# EAGLE board HighVoltageOutputMirror (EAGLE 9.0.1)
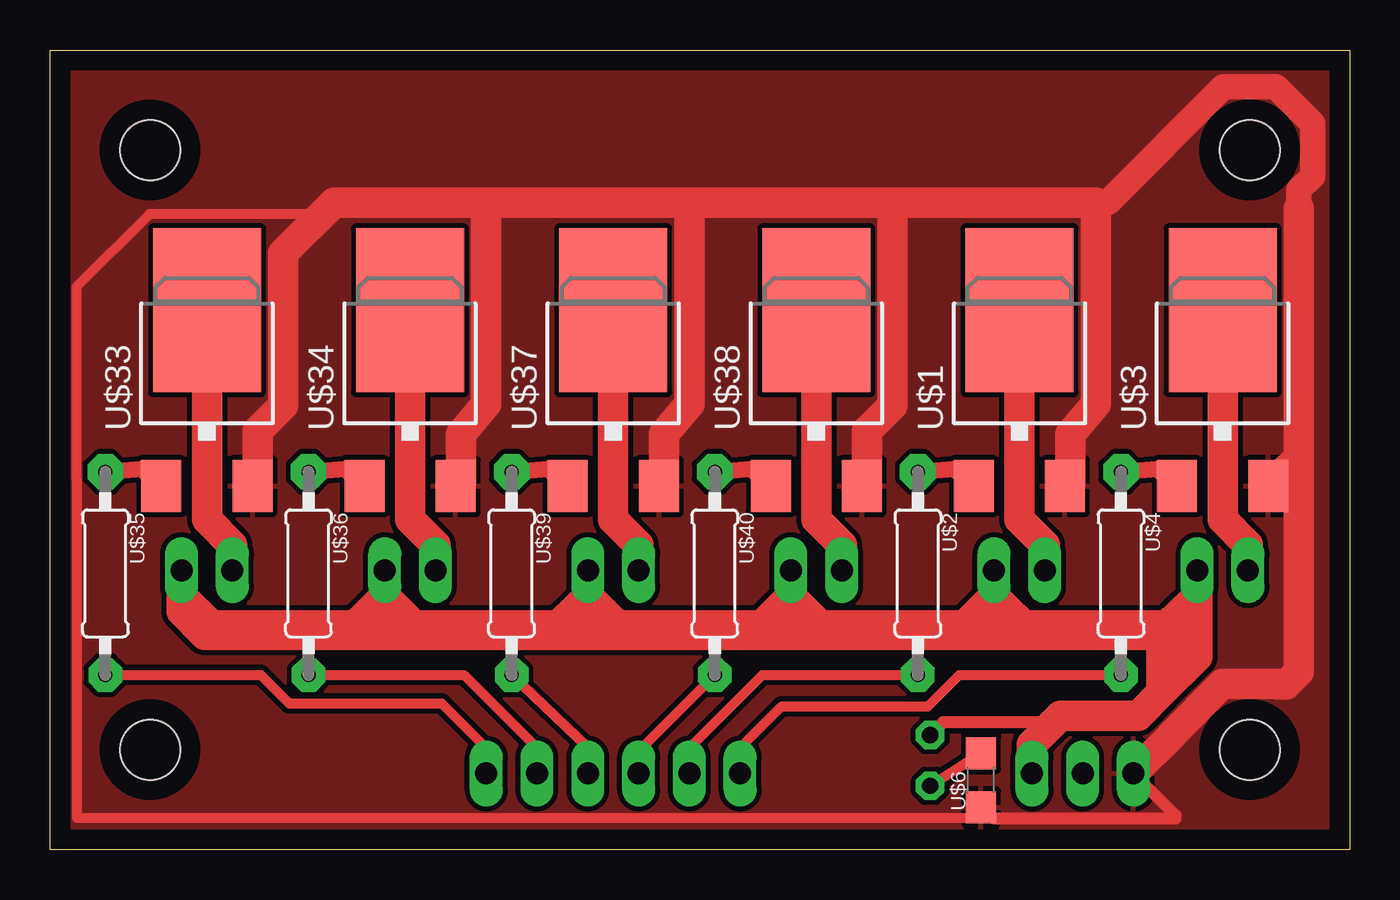
[diagram p0: board, top side]
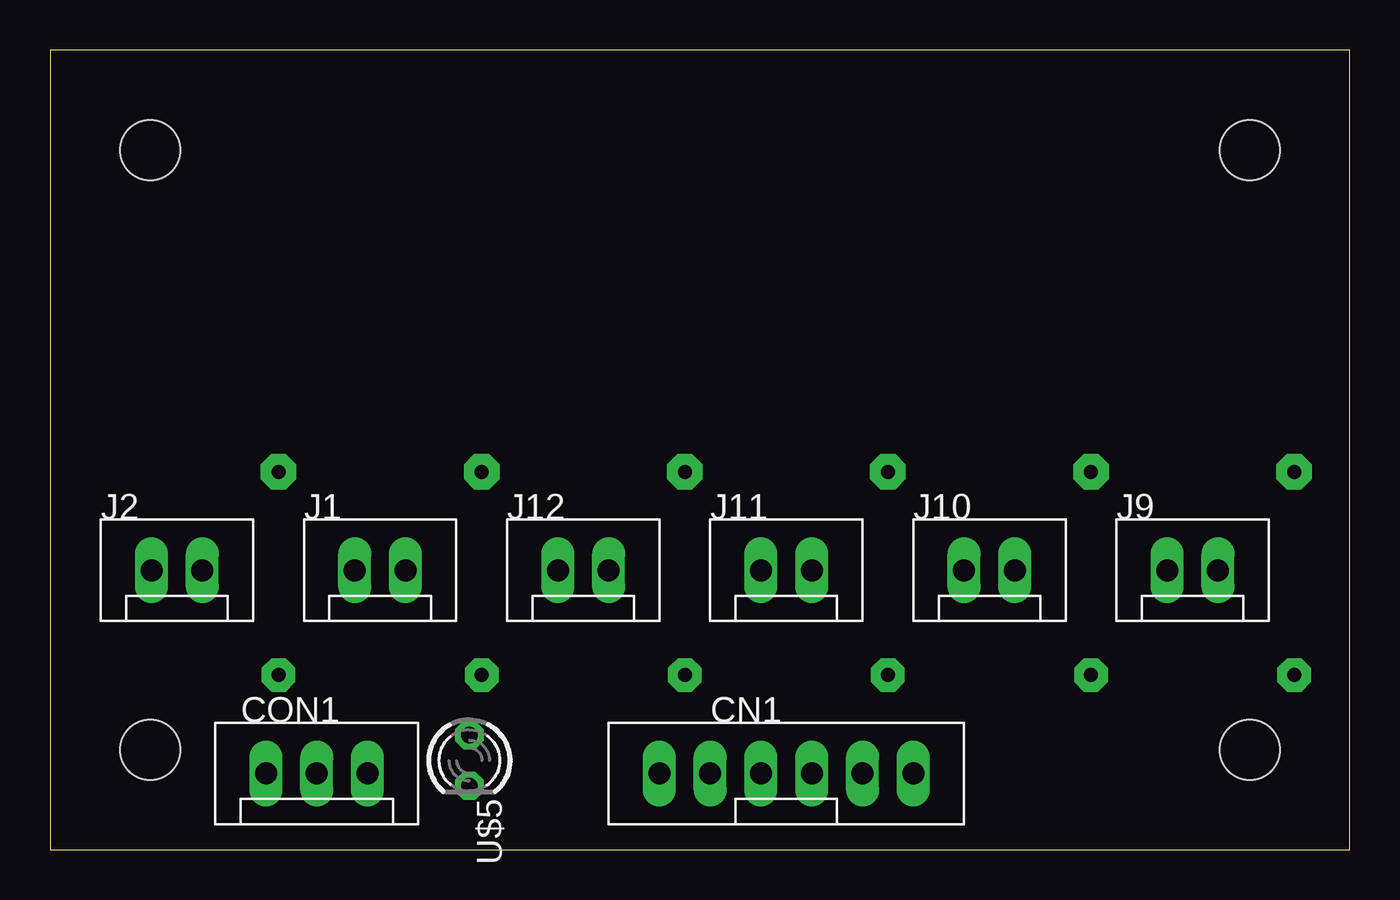
[diagram p1: board, bottom side, seen from below]

Size 65 x 40 mm. Coordinates in mm from the lower left corner, seen from the top.
Outline: 65,0 0,0 0,40 65,40 65,0
Copper layers (1*16): Top 0.035mm / dielectric 1.5mm / Bottom 0.035mm
Design rules "default *": minimum track width 6mil, minimum drill 0.35mm, track to track 10mil, track to pad 10mil, pad to pad 10mil, via to via 10mil, smd to smd 6mil, copper to edge 40mil, drill to drill 6mil, minimum pad ring 10mil, minimum via ring 8mil, stop-mask expansion 4mil, vias tented up to drill 0mil, thermal gap 10mil
Holes 3 mm at 60,5 5,5 5,35 60,35

## Footprints (pad centres in the part's own frame; a part is rotated, then mirrored left to right if it is on the bottom)
CON6 = drill 1.1 long: P$1 6.35,0; P$2 3.81,0; P$3 1.27,0; P$4 -1.27,0; P$5 -3.81,0; P$6 -6.35,0
CON3 = drill 1.1 long: P$1 2.54,0; P$2 0,0; P$3 -2.54,0
CON2 = drill 1.1 long: P$1 1.27,0; P$2 -1.27,0
TO-252FORHAND = smd 2 x 2.6: 1 -2.28,-5.3; 2 2.28,-5.3 | smd 5.4 x 8.2: 3 0,3.5
1/4W-H4_(0207/10) = drill 0.7 pad 1.778 octagon: 1 -5.08,0 | drill 0.7 pad 1.676 octagon: 2 5.08,0
LED3MM = drill 0.813 pad 1.422 octagon: A -1.27,0; K 1.27,0
0805(JIS2012)HAND = smd 1.6 x 1.5: 1 -1.35,0; 2 1.35,0

## Placement (x,y rotation side)
CN1  CON6  [CON6]  28.17,3.81 0 bottom
CON1  CON3  [CON3]  51.66,3.81 0 bottom
J1  CON2  [CON2]  48.49,13.97 0 bottom
J2  CON2  [CON2]  58.65,13.97 0 bottom
J9  CON2  [CON2]  7.85,13.97 0 bottom
J10  CON2  [CON2]  18.01,13.97 0 bottom
J11  CON2  [CON2]  28.17,13.97 0 bottom
J12  CON2  [CON2]  38.33,13.97 0 bottom
U$1  TO-252(MOS-FET_N)TO-252FORHAND  [TO-252FORHAND]  48.49,23.48 0 top
U$2  330  [1/4W-H4_(0207/10)]  43.41,13.81 270 top
U$3  TO-252(MOS-FET_N)TO-252FORHAND  [TO-252FORHAND]  58.65,23.48 0 top
U$4  330  [1/4W-H4_(0207/10)]  53.57,13.81 270 top
U$5  LED(砲弾型)3  [LED3MM]  44.03,4.46 270 bottom
U$6  47k  [0805(JIS2012)HAND]  46.56,3.47 90 top
U$33  TO-252(MOS-FET_N)TO-252FORHAND  [TO-252FORHAND]  7.85,23.48 0 top
U$34  TO-252(MOS-FET_N)TO-252FORHAND  [TO-252FORHAND]  18.01,23.48 0 top
U$35  330  [1/4W-H4_(0207/10)]  2.77,13.81 270 top
U$36  330  [1/4W-H4_(0207/10)]  12.93,13.81 270 top
U$37  TO-252(MOS-FET_N)TO-252FORHAND  [TO-252FORHAND]  28.17,23.48 0 top
U$38  TO-252(MOS-FET_N)TO-252FORHAND  [TO-252FORHAND]  38.33,23.48 0 top
U$39  330  [1/4W-H4_(0207/10)]  23.09,13.81 270 top
U$40  330  [1/4W-H4_(0207/10)]  33.25,13.81 270 top

## Library data of the parts
CN1 CON1 J1 J2 J9-J12 = (コネクタ)XH
U$1 U$3 U$33 U$34 U$37 U$38 = (半導体)FET＆トランジスタ
U$2 U$4 U$35 U$36 U$39 U$40 = (Foundation)抵抗
U$5 = (半導体)LED
U$6 = (Foundation)表面実装RC

## Nets
+24V: CON1.P$1 J1.P$1 J2.P$1 J9.P$1 J10.P$1 J11.P$1 J12.P$1 U$5.A
DGND: CON1.P$3 U$1.2 U$3.2 U$6.1 U$33.2 U$34.2 U$37.2 U$38.2
N$1: CN1.P$5 U$2.2
N$2: U$1.1 U$2.1
N$3: J1.P$2 U$1.3
N$4: CN1.P$6 U$4.2
N$5: U$3.1 U$4.1
N$6: J2.P$2 U$3.3
N$7: CN1.P$2 U$36.2
N$8: U$5.K U$6.2
N$25: CN1.P$1 U$35.2
N$27: CN1.P$3 U$39.2
N$28: CN1.P$4 U$40.2
N$32: U$33.1 U$35.1
N$33: U$34.1 U$36.1
N$34: J9.P$2 U$33.3
N$35: J10.P$2 U$34.3
N$36: U$37.1 U$39.1
N$37: U$38.1 U$40.1
N$38: J11.P$2 U$37.3
N$39: J12.P$2 U$38.3

## Tracks (layer width: path | path; a pad name or v marks a point on that pad's centre or on a via)
+24V
  Top 0.61: 50.22,6.37 44.68,6.37 U$5.A
  Top 1.524: 56.24,11.56 57.38,12.7 J2.P$1 57.38,11.2 | 56.24,11.56 55.47,10.79 | 55.47,10.79 49.12,10.79 | 49.12,10.79 47.22,12.7 | 47.22,12.7 J1.P$1 47.22,11.11 46.9,10.79 | 47.22,12.7 45.31,10.79 | 45.31,10.79 38.96,10.79 | 38.96,10.79 37.06,12.7 | 37.06,12.7 J12.P$1 37.06,11.11 37.38,10.79 | 37.06,12.7 35.15,10.79 | 35.15,10.79 28.8,10.79 | 28.8,10.79 26.9,12.7 | 26.9,12.7 J11.P$1 26.9,11.11 26.58,10.79 | 26.9,12.7 24.99,10.79 | 24.99,10.79 18.64,10.79 | 18.64,10.79 16.74,12.7 | 16.74,12.7 J10.P$1 16.74,10.79 | 16.74,12.7 14.83,10.79 | 14.83,10.79 8.48,10.79 8.08,11.2 | 55.47,10.79 55.32,10.64 55.23,10.73 7.75,10.73 6.58,11.9 J9.P$1 6.58,12.7 8.08,11.2 | 49.12,10.79 46.9,10.79 | 46.9,10.79 45.31,10.79 | 38.96,10.79 37.38,10.79 | 37.38,10.79 35.15,10.79 | 28.8,10.79 26.58,10.79 | 26.58,10.79 24.99,10.79 | 14.83,10.79 16.74,10.79 | 16.74,10.79 18.64,10.79 | CON1.P$1 49.12,5.27 50.22,6.37 50.53,6.69 54.42,6.69 55.59,7.85 | 57.38,11.2 57.38,9.64 55.59,7.85 | 55.59,7.85 55.59,10.68 55.47,10.79 | 56.24,11.56 56.24,9.85 56.29,9.8 56.13,9.8 | 8.08,11.2 57.38,11.2
DGND
  Top 0.508: 14.2,32.37 13.63,31.8 4.98,31.8 1.32,28.14 1.32,18.51 1.34,18.49 1.34,1.59 45.76,1.59
  Top 0.61: U$6.1 47.23,1.56 56.29,1.56 56.29,1.72 CON1.P$3
  Top 1.27: 62.46,32.05 62.46,33 63.15,33.7 63.15,36.3 61.3,38.15 58.69,38.15 52.91,32.37 52.3,32.37
  Top 1.524: U$33.2 10.39,18.32 10.39,20.94 11.66,22.21 11.66,29.83 14.2,32.37 21.82,32.37 | 21.82,32.37 21.82,22.29 20.55,20.79 20.55,18.32 U$34.2 | 21.82,32.37 31.98,32.37 | 31.98,32.37 31.98,22.29 30.71,20.79 30.71,18.32 U$37.2 | 31.98,32.37 42.14,32.37 | 42.14,32.37 42.14,22.21 40.87,20.94 40.87,18.32 U$38.2 | 42.14,32.37 52.3,32.37 52.3,22.29 51.03,20.79 51.03,18.32 U$1.2 | 62.46,19.59 62.46,32.05 | 62.46,19.59 U$3.2 | 62.46,19.59 62.46,8.89 61.82,8.26 61.38,8.26 61.36,8.28 58.64,8.28 56.11,5.75 56.11,5.72 CON1.P$3
  pour Top: 65,0 65,40 0,40 0,0
N$1
  Top 0.508: CN1.P$5 31.98,5.08 35.63,8.73 U$2.2
N$2
  Top 0.813: U$2.1 45.22,19.05 U$1.1
N$3
  Top 1.524: J1.P$2 49.76,15.24 48.49,16.51 U$1.3
N$4
  Top 0.508: CN1.P$6 34.52,5.08 36.59,7.15 43.9,7.15 45.48,8.73 U$4.2
N$5
  Top 0.813: U$4.1 55.38,19.05 U$3.1
N$6
  Top 1.524: U$3.3 58.65,16.51 59.92,15.24 J2.P$2
N$7
  Top 0.508: U$36.2 20.71,8.73 24.36,5.08 CN1.P$2
N$8
  Top 0.508: U$5.K U$6.2
N$25
  Top 0.508: U$35.2 10.55,8.73 11.97,7.31 19.59,7.31 21.82,5.08 CN1.P$1
N$27
  Top 0.508: U$39.2 26.9,5.08 CN1.P$3
N$28
  Top 0.508: CN1.P$4 29.44,4.92 U$40.2
N$32
  Top 0.813: U$35.1 4.58,19.05 U$33.1
N$33
  Top 0.813: U$36.1 14.74,19.05 U$34.1
N$34
  Top 1.524: U$33.3 7.85,16.51 9.12,15.24 J9.P$2
N$35
  Top 1.524: U$34.3 18.01,16.51 19.28,15.24 J10.P$2
N$36
  Top 0.813: U$39.1 24.9,19.05 U$37.1
N$37
  Top 0.813: U$40.1 35.06,19.05 U$38.1
N$38
  Top 1.524: U$37.3 28.17,16.51 29.44,15.24 J11.P$2
N$39
  Top 1.524: U$38.3 38.33,16.51 39.6,15.24 J12.P$2